# Altium PCB 100871.pcbdoc (part 1 of 2)
Units mm, origin at the board's own origin, x right, y up, seen from the top; angles counter-clockwise.
Board outline 100 x 40 mm, 2 copper layers (Top Layer, Bottom Layer), stack 1.551 mm thick; 101 components, 40 nets, 215 pads, 100 vias.
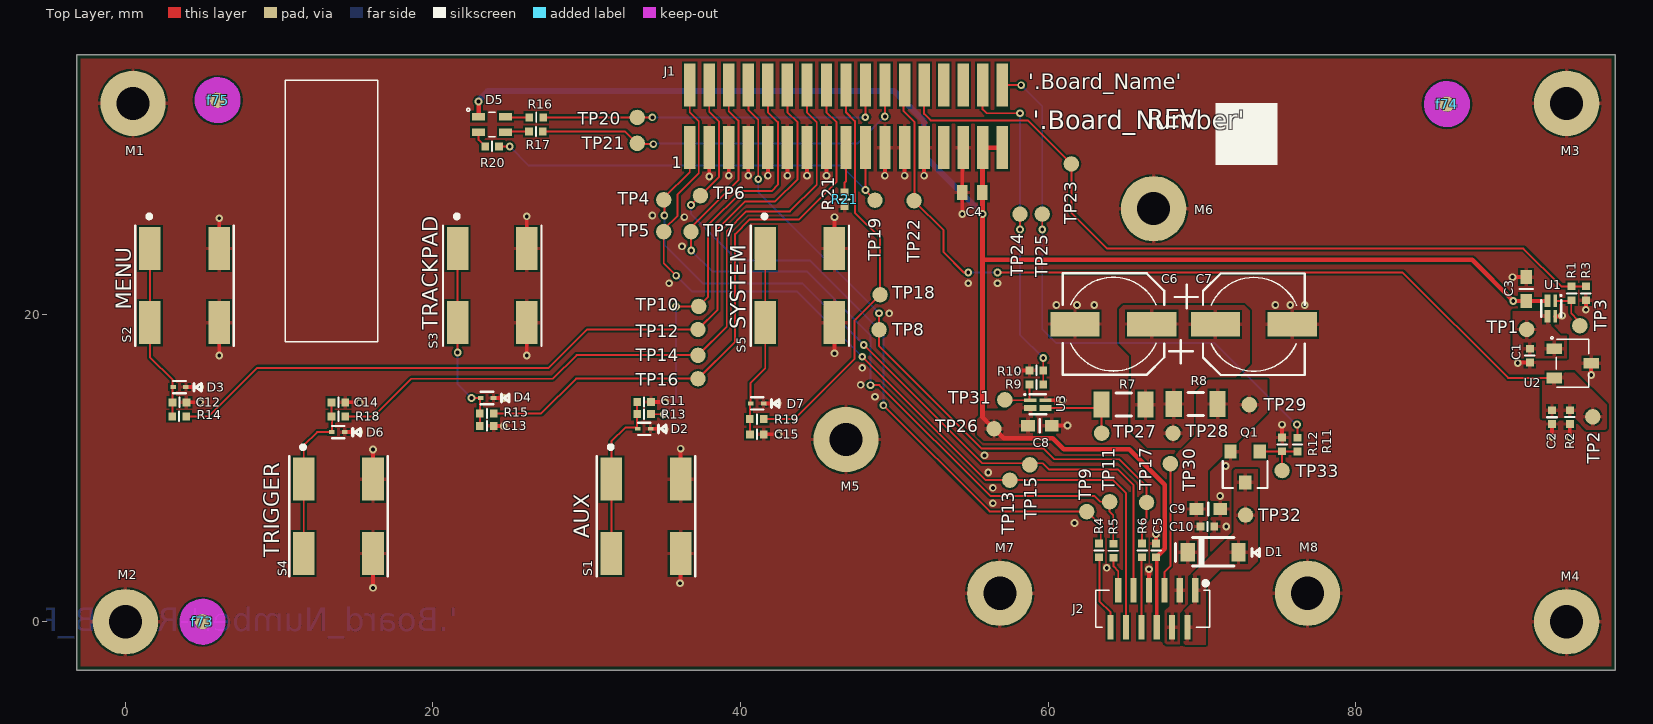
[diagram p0: Top Layer view]
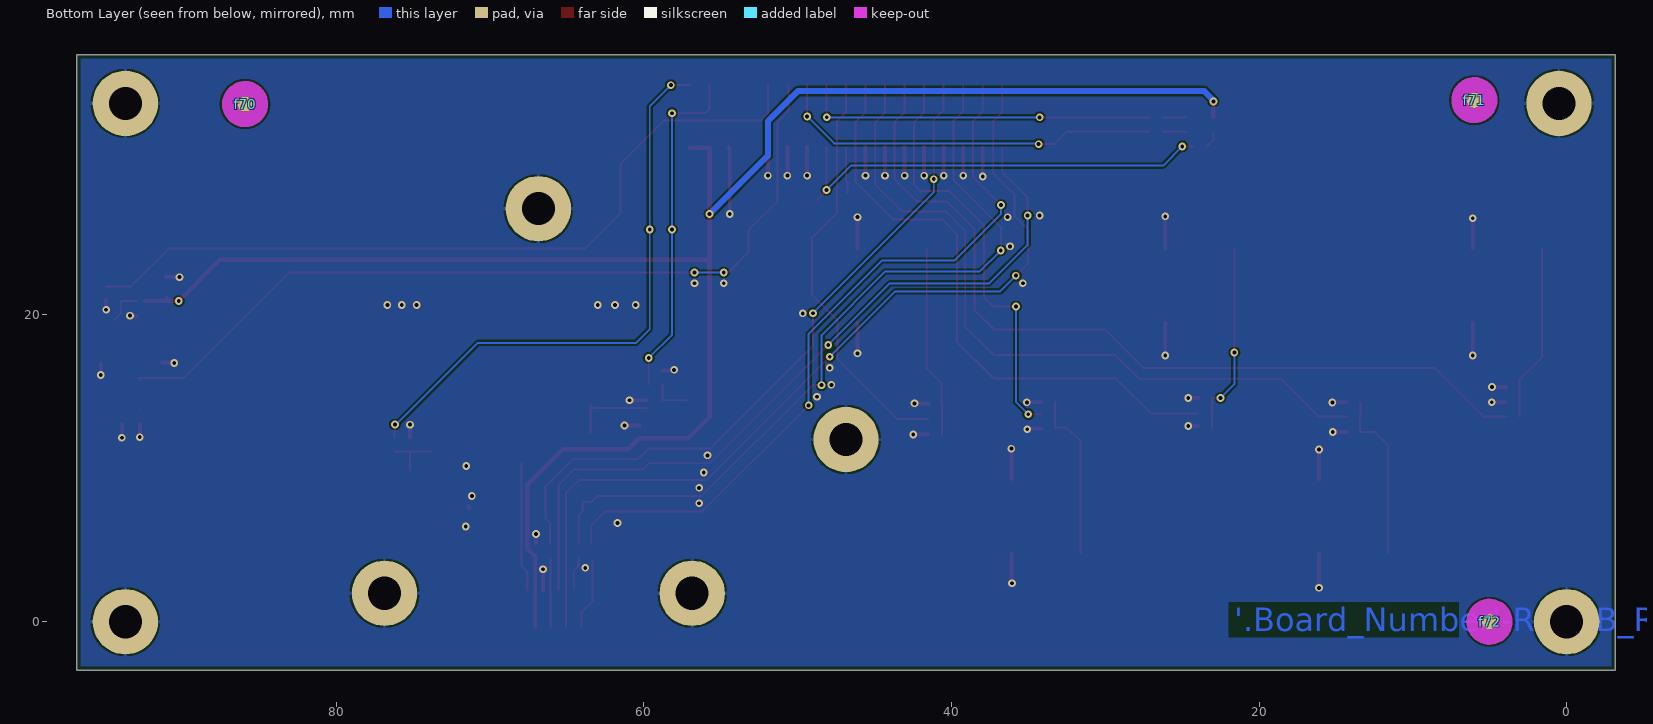
[diagram p1: Bottom Layer view, seen from below]

## Layer stack, top to bottom
Top Solder: solder mask 0.0102, Solder Resist, Dk 3.5
Top Layer: signal copper 0.0356
Dielectric 1: core 1.48, FR-4, Dk 4.2
Bottom Layer: signal copper 0.0356
Bottom Solder: solder mask 0.0102, Solder Resist, Dk 3.5

## Board outline
-3.15,-3.15 -3.15,36.85 96.85,36.85 96.85,-3.15

## Design rules (kind name [scope] priority, off if disabled: settings)
BoardOutlineClearance [All] p1: gap=0.25 except(0: Text-OutlineEdge)
Clearance [All] p1: gap=0.125
ComponentClearance [All] p1: gap=0.18 collisioncheckmode=3 verticalgap=0.18 showdistances=FALSE
HoleSize [All] p1: absolutevalues=TRUE maxlimit=2.7 minlimit=0.025 maxpercent=80.000 minpercent=20.000
MinimumSolderMaskSliver MinimumSolderMaskSliver_1 [isvia vs IsPad] p1: minsoldermaskwidth=0
MinimumSolderMaskSliver [All] p2: minsoldermaskwidth=0.05
PlaneClearance [All] p1: clearance=0.2
PlaneConnect [All] p1: planeconnectstyle=Direct reliefexpansion=0.508 reliefentries=4 reliefconductorwidth=0.254 reliefairgap=0.254
PolygonConnect MTG [HasFootprint('MTG197RD102P')] p1: connectstyle=Direct reliefconductorwidth=0.25 reliefentries=4 polygonreliefangle="90 Angle" airgapwidth=0.125
PolygonConnect POLY_VIA [IsVia vs IsPolygon] p2: connectstyle=Direct reliefconductorwidth=0.254 reliefentries=4 polygonreliefangle="90 Angle" airgapwidth=0.254
PolygonConnect PolygonConnect_1 [All] p3: connectstyle=Relief reliefconductorwidth=0.25 reliefentries=4 polygonreliefangle="90 Angle" airgapwidth=0.125
RoomDefinition ControlBoard [InComponentClass('ControlBoard')] p1: confinementstyle=ConfineIn formatcopy=TRUE lockcomponents=FALSE outline -2.985,-3.217 102.451,-3.217 102.451,38.85 -2.985,38.85
RoutingVias [All] p1: holewidth=0.25 width=0.5 viastyle="Through Hole" minholewidth=0.25 minwidth=0.5 maxholewidth=0.25 maxwidth=0.5
SilkToSilkClearance [All] p1 off: silktosilkclearance=0.05
SilkToSolderMaskClearance [IsPad] p1: minsilkscreentomaskgap=0.125 clearancetoexposedcopper=TRUE
SolderMaskExpansion [All] p1: expansion=0.05
Width PWR_GND [InNetClass('PWR_GND')] p1: maxlimit=0.5 minlimit=0.25 preferedwidth=0.25
Width CRITICAL [InNetClass('MOTOR_DRIVERS')] p2: maxlimit=0.4 minlimit=0.3 preferedwidth=0.4
Width [All] p3: maxlimit=0.5 minlimit=0.125 preferedwidth=0.125
23 further rules are at their usual default settings.

## Classes and differential pairs
component class ControlBoard: C1 C2 C3 C4 C5 C6 C7 C8 C9 C10 C11 C12 C13 C14 C15 D1 D2 D3 D4 D5 D6 D7 J1 J2 M1 M2 M3 M4 M5 M6 M7 M8 Q1 R1 R2 R3 R4 R5 R6 R7 R8 R9 R10 R11 R12 R13 R14 R15 R16 R17 R18 R19 R20 R21 S1 S2 S3 S4 S5 TP1 TP2 TP3 TP4 TP5 TP6 TP7 TP8 TP9 TP10 TP11 TP12 TP13 TP14 TP15 TP16 TP17 TP18 TP19 TP20 TP21 TP22 TP23 TP24 TP25 TP26 TP27 TP28 TP29 TP30 TP31 TP32 TP33 U1 U2 U3

## Components (designator, comment, footprint, x,y, rotation, side; value= is the part's Value field where it differs from the comment)
C1 "10nF" 0402-ipcsm_60 91.307,17.301 r270 top
C2 "10nF" 0402-ipcsm_60 92.746,13.301 r270 top
C3 "0.1UF" 0603-ipcsm_90 91.069,21.626 r90 top
C4 "10uF" c-0603-POL_35H 55.056,27.904 r180 top
C5 "0.1uF" 0402-IPCsm_55 67.017,4.633 r90 top
C6 "330UF" c-elect_FK-D8 64.234,19.35 r0 top
C7 "330UF" c-elect_FK-D8 73.365,19.337 r180 top
C8 "0.1UF" 0603-ipcsm_90 59.45,12.751 r0 top
C9 "1uF" 0603-IPCsm_90 70.4,7.328 r180 top
C10 "0.1uF" 0402-IPCsm_55 70.342,6.194 r0 top
C11 "0.1uF" 0402-IPCsm_55 33.725,14.285 r0 top
C12 "0.1uF" 0402-IPCsm_55 3.52,14.267 r0 top
C13 "0.1uF" 0402-IPCsm_55 23.5,12.734 r0 top
C14 "0.1uF" 0402-IPCsm_55 13.85,14.267 r0 top
C15 "0.1uF" 0402-IPCsm_55 41.055,12.185 r0 top
D1 "1N4148W" SOD123_135 70.717,4.517 r0 top
D2 "ESD9R3.3ST5G" sod923-40 33.725,12.541 r0 top
D3 "ESD9R3.3ST5G" sod923-40 3.52,15.255 r0 top
D4 "ESD9R3.3ST5G" sod923-40 23.514,14.548 r0 top
D5 "APTF1616SEEZGQBDC" led_RBG_1p6x1p6_sm 23.84,32.33 r180 top
D6 "ESD9R3.3ST5G" sod923-40 13.85,12.327 r0 top
D7 "ESD9R3.3ST5G" sod923-40 41.07,14.193 r0 top
f70 "Comment" Fiducial_c100opening300 85.915,33.65 r180 bottom
f71 "Comment" Fiducial_c100opening300 6,33.905 r180 bottom
f72 "Comment" Fiducial_c100opening300 5.015,0 r180 bottom
f73 "Comment" Fiducial_c100opening300 5.015,0 r0 top
f74 "Comment" Fiducial_c100opening300 85.915,33.65 r0 top
f75 "Comment" Fiducial_c100opening300 6,33.905 r0 top
J1 "FTSH-117-01-L-DV" FTSH-117-01-XXX-DV-K 46.85,32.85 r0 top
J2 "MOLEX_ 0781271128" con12_molex_0781271128 66.8,0.85 r0 top
M1 "MTGC425H215P" MTGC425H215P 0.5,33.7 r0 top
M2 "MTGC425H215P" MTGC425H215P 0,0 r0 top
M3 "MTGC425H215P" MTGC425H215P 93.7,33.7 r0 top
M4 "MTGC425H215P" MTGC425H215P 93.7,0 r0 top
M5 "MTGC425H215P" mtgc425h215p 46.85,11.85 r0 top
M6 "MTGC425H215P" mtgc425h215p 66.85,26.85 r0 top
M7 "MTGC425H215P" MTGC425H215P 56.85,1.85 r0 top
M8 "MTGC425H215P" MTGC425H215P 76.85,1.85 r0 top
Q1 "DMN2300U-7" SOT23-GSD_47H_DMN2075U 72.8,10.048 r180 top
R1 "240" 0402-IPCsm_40 94.029,21.351 r270 top
R2 "4.7K" 0402-IPCsm_40 93.904,13.301 r270 top
R3 "4.7K" 0402-IPCsm_40 94.949,21.351 r270 top
R4 "33" 0402-IPCsm_40 63.3,4.633 r270 top
R5 "33" 0402-IPCsm_40 64.224,4.615 r270 top
R6 "33" 0402-IPCsm_40 66.1,4.633 r270 top
R7 "5.1" r-1206_28H 64.895,14.11 r0 top
R8 "0.0" r-1206_28H 69.583,14.155 r0 top
R9 "348K" 0402-IPCsm_40 59.225,15.425 r180 top
R10 "4.7K" 0402-IPCsm_40 59.225,16.342 r180 top
R11 "0" 0402-IPCsm_40 76.2,11.512 r270 top
R12 "10K" 0402-IPCsm_40 75.2,11.525 r90 top
R13 "33" 0402-IPCsm_40 33.725,13.489 r180 top
R14 "33" 0402-IPCsm_40 3.5,13.35 r180 top
R15 "33" 0402-IPCsm_40 23.5,13.539 r180 top
R16 "240" 0402-IPCsm_40 26.715,32.787 r180 top
R17 "124" 0402-IPCsm_40 26.69,31.87 r180 top
R18 "33" 0402-IPCsm_40 13.85,13.35 r180 top
R19 "33" 0402-IPCsm_40 41.05,13.169 r180 top
R20 "124" 0402-IPCsm_40 23.84,30.9 r180 top
R21 "0" 0402-IPCsm_40 46.762,27.46 r90 top
S1 "TL3301EF160QJ" SW_TL3301_J 33.85,6.85 r270 top
S2 "TL3301EF160QJ" SW_TL3301_J 3.85,21.85 r270 top
S3 "TL3301EF160QJ" SW_TL3301_J 23.85,21.85 r270 top
S4 "TL3301EF160QJ" SW_TL3301_J 13.85,6.85 r270 top
S5 "TL3301EF160QJ" SW_TL3301_J 43.85,21.85 r270 top
TP1 "tp-1mm" TP-S100_SMT 91.1,19 r0 top
TP2 "tp-1mm" TP-S100_SMT 95.4,13.32 r0 top
TP3 "tp-1mm" TP-S100_SMT 94.558,19.244 r0 top
TP4 "tp-1mm" TP-S100_SMT 35,27.425 r0 top
TP5 "tp-1mm" TP-S100_SMT 35,25.358 r0 top
TP6 "tp-1mm" TP-S100_SMT 37.384,27.7 r90 top
TP7 "tp-1mm" TP-S100_SMT 36.777,25.358 r90 top
TP8 "tp-1mm" TP-S100_SMT 49,18.978 r180 top
TP9 "tp-1mm" TP-S100_SMT 62.5,7.157 r90 top
TP10 "tp-1mm" TP-S100_SMT 37.275,20.5 r90 top
TP11 "tp-1mm" TP-S100_SMT 63.991,7.8 r90 top
TP12 "tp-1mm" TP-S100_SMT 37.229,19 r90 top
TP13 "tp-1mm" TP-S100_SMT 57.5,9.2 r90 top
TP14 "tp-1mm" TP-S100_SMT 37.229,17.317 r90 top
TP15 "tp-1mm" TP-S100_SMT 58.8,10.2 r90 top
TP16 "tp-1mm" TP-S100_SMT 37.229,15.796 r90 top
TP17 "tp-1mm" TP-S100_SMT 66.393,7.756 r90 top
TP18 "tp-1mm" TP-S100_SMT 49.067,21.255 r180 top
TP19 "tp-1mm" TP-S100_SMT 48.734,27.4 r90 top
TP20 "tp-1mm" TP-S100_SMT 33.275,32.787 r0 top
TP21 "tp-1mm" TP-S100_SMT 33.275,31.1 r90 top
TP22 "tp-1mm" TP-S100_SMT 51.275,27.375 r90 top
TP23 "tp-1mm" TP-S100_SMT 61.5,29.762 r90 top
TP24 "tp-1mm" TP-S100_SMT 58.158,26.5 r90 top
TP25 "tp-1mm" TP-S100_SMT 59.608,26.5 r90 top
TP26 "tp-1mm" TP-S100_SMT 56.475,12.547 r90 top
TP27 "tp-1mm" TP-S100_SMT 63.47,12.255 r90 top
TP28 "tp-1mm" TP-S100_SMT 68.112,12.255 r90 top
TP29 "tp-1mm" TP-S100_SMT 73.07,14.11 r90 top
TP30 "tp-1mm" TP-S100_SMT 67.936,10.276 r0 top
TP31 "tp-1mm" TP-S100_SMT 57.175,14.424 r0 top
TP32 "tp-1mm" TP-S100_SMT 72.826,6.931 r270 top
TP33 "tp-1mm" TP-S100_SMT 75.2,9.825 r270 top
U1 "SLG59M1440V" STDFN4_SLG59M144x 92.702,20.361 r270 top
U2 "A1304ELHLX-T" sot23-3_A1304_113 94.092,16.801 r270 top
U3 "SLG59M1442V" STDFN4_SLG59M144x 59.325,14.145 r0 top

## Footprints (in the part's own frame and the unit in brackets; to place one, negate y for a bottom-side part, rotate by r counter-clockwise, add the part's x,y. Pads: shape width x height; smd on the part's side, far side on the other; paste and mask are expansions set on the pad)
0402-IPCsm_40 [mm] "0402-IPCSM_40"
  rect 0.5x0.52 smd mask+0.05: 1(-0.45,0) 2(0.45,0)
  silkscreen extent 0,-0.3 0,0.3, body extent -0.5,-0.2 0.5,0.2, height 0.4
0402-IPCsm_55 [mm] "0402-IPCSM_55"
  rect 0.5x0.52 smd mask+0.05: 1(-0.45,0) 2(0.45,0)
  silkscreen extent 0,-0.3 0,0.3, body extent -0.5,-0.2 0.5,0.2, height 0.55
0402-ipcsm_60 [mm] "0402-IPCSM_60"
  rect 0.5x0.52 smd mask+0.05: 1(-0.45,0) 2(0.45,0)
  silkscreen extent 0,-0.3 0,0.3, body extent -0.5,-0.2 0.5,0.2, height 0.6
0603-ipcsm_90 [mm] "0603-IPCSM_90"
  rect 0.9x0.75 smd mask+0.05: 1(0.775,0) 2(-0.775,0)
  silkscreen extent 0,-0.42 0,0.42, body extent -0.8,-0.3 0.8,0.3, height 0.9
0603-IPCsm_90 [mm] "0603-IPCSM_90"
  rect 0.9x0.75 smd mask+0.05: 1(0.775,0) 2(-0.775,0)
  silkscreen extent 0,-0.42 0,0.42, body extent -0.8,-0.3 0.8,0.3, height 0.9
c-0603-POL_35H [mm] "c-0603-POL_35H"
  rect 0.7x1 smd mask+0.05: N(0.65,0) P(-0.65,0)
  body extent -0.8,-0.4 0.8,0.4, height 0.9
c-elect_FK-D8 [mm] "C-ELECT_FK-D"
  rect 3.2x1.6 smd: N(-2.5,0) P(2.5,0)
  silkscreen extent -3.3,-3.3 5.16,3.3, body extent -3.3,-3.3 3.3,3.3, height 8
con12_molex_0781271128 [mm] "con12_molex_0781271128"
  rect 0.4x1.6 smd: 1(2.75,1.2) 2(2.25,-1.2) 3(1.75,1.2) 4(1.25,-1.2) 5(0.75,1.2) 6(0.25,-1.2) 7(-0.25,1.2) 8(-0.75,-1.2) 9(-1.25,1.2) 10(-1.75,-1.2) 11(-2.25,1.2) 12(-2.75,-1.2)
  silkscreen extent -3.7,-1.2 3.7,1.78, body extent -3.7,-1.2 3.7,1.2, height 4.1
Fiducial_c100opening300 [mm]
  round 1 smd paste-10 mask+1: 0(0,0)
  Top Layer keep-out circle w1: c0,0 r1
FTSH-117-01-XXX-DV-K [mil]
  rect 29x110 smd mask+2: 1(-400,-80) 2(-400,80) 3(-350,-80) 4(-350,80) 5(-300,-80) 6(-300,80) 7(-250,-80) 8(-250,80) 9(-200,-80) 10(-200,80) 11(-150,-80) 12(-150,80) 13(-100,-80) 14(-100,80) 15(-50,-80) 16(-50,80) 17(0,-80) 18(0,80) 19(50,-80) 20(50,80) 21(100,-80) 22(100,80) 23(150,-80) 24(150,80) 25(200,-80) 26(200,80) 27(250,-80) 28(250,80) 29(300,-80) 30(300,80) 31(350,-80) 32(350,80) 33(400,-80) 34(400,80)
  body extent -424,-68 425,68, height 220
led_RBG_1p6x1p6_sm [mm] "led_RBG_1p6x1p6_sm"
  rect 0.85x0.5 smd mask+0.1: 1(0.875,-0.5) 2(-0.875,-0.5) 3(-0.875,0.5) 4(0.875,0.5)
  silkscreen extent -0.2,-1.05 1.65,0.8, body extent -0.8,-0.8 0.8,0.8, height 0.7
MTGC425H215P [mm] "MTGC425H215P"
  round 4.25 hole 2.15: 1(0,0)
mtgc425h215p [mm] "MTGC425H215P"
  round 4.25 hole 2.15: 1(0,0)
r-1206_28H [mm] "Chip Resistor, 2-Leads, Body 3.10x1.60mm, IPC Medium Density"
  rect 1.05x1.7 smd: 1(-1.425,0) 2(1.425,0)
  silkscreen extent -0.5,-0.75 0.5,0.75, body extent -1.6,-0.85 1.6,0.85, height 0.65
SOD123_135 [mm] "SOD123_135"
  rect 0.92x1.22 smd: A(1.65,0) C(-1.65,0)
  silkscreen extent -2.45,-0.9 3.03,0.95
sod923-40 [mm] "SOD923 .4mm High"
  rect 0.36x0.25 smd mask+0.05: A(0.42,0) C(-0.42,0)
  silkscreen extent -0.4,-0.4 1.44,0.4, body extent -0.45,-0.35 0.45,0.35, height 0.4
sot23-3_A1304_113 [mm] "sot23-3_A1304_113"
  rect 0.7x1 smd mask+0.05: 1(-0.95,-1.2) 2(0.95,-1.2) 3(0,1.2)
  silkscreen extent -1.73,-1.42 1.55,1.04, body extent -1.55,-1.05 1.55,1.05, height 1.13
SOT23-GSD_47H_DMN2075U [mm] "SOT23-GSD_47H_DMN2075U"
  rect 0.8x0.9 smd mask+0.05: D(0,0.987) G(-0.95,-1.013) S(0.95,-1.013)
  silkscreen extent -1.45,-0.38 1.45,1.36, body extent -1.43,-0.68 1.45,0.65, height 1.2
STDFN4_SLG59M144x [mm] "SLG59M1442V or SLG59M1440V"
  rect 0.8x0.21 smd mask+0.05: 1(-0.5,0.25) 4(0.5,0.25)
  rect 0.8x0.41 smd mask+0.05: 2(-0.5,-0.25) 3(0.5,-0.25)
  silkscreen extent -0.91,-0.66 0.53,0.68, body extent -0.53,-0.53 0.53,0.53, height 0.6
SW_TL3301_J [mm] "SWITCH TACTILE SPST-NO 0.05A 12V"
  rect 2.795x1.4 smd mask+0.05: 1(-2.412,-2.25) 2(2.412,-2.25) 3(-2.412,2.25) 4(2.412,2.25)
  silkscreen extent -4.62,-3.2 3.9,3.2, body extent -3,-3 3,3, height 3.6
TP-S100_SMT [mm] "TP-S100_SMT"
  round 1 smd paste-0.5: 1(0,0)
  body extent -0.5,-0.5 0.5,0.5, height 0.01

## Part data
C1 C2: library part C1005X7R1E103K050BB, "CAP CER 10000PF 25V 10% X7R 0402"
C3 C8: library part C0603C104J4RACTU, "CAP CER 0.1UF 16V 5% X7R 0603"
C4: library part 298D106X06R3M2T, "CAP TANT 10UF 6.3V 20% 0603"
C5 C10 C11 C12 C13 C14 C15: library part GMK105BJ104KV-F, "CAP CER 0.1UF 35V 10% X5R 0402"
C6 C7: library part EEE-FK0J331XP, "CAP ALUM 330UF 20% 6.3V SMD"
C9: library part GRM188R61E105KA12D, "CAP CER 1UF 25V 10% X5R 0603"
D1: library part 1N4148W-TP, "DIODE SWITCH 100V 0.15A SOD123"
D2 D3 D4 D6 D7: "TVS DIODE 3.3VWM 7.8VC SOD923"
D5: "LED RGB CLEAR 0606 SMD"
J1: "34 Positions Header, Unshrouded Connector 0.050\" (1.27mm) Surface Mount Gold"
J2: library part 0781271128, "CONN FFC VERT 12POS 0.50MM SMD"
M1 M2 M3 M4 M5 M6 M7 M8: "MTG, 4.25mm PAD, 2.15mm Plated Hole"
Q1: "MOSFET N-CH 20V 1.24A SOT23"
R1 R16: library part ERJ-2RKF2400X, "RES 240 OHM 1/10W 1% 0402 SMD"
R2 R3 R10: library part ERJ-2RKF4701X, "RES 4.70K OHM 1/10W 1% 0402 SMD"
R4 R5 R6 R13 R14 R15 R18 R19: library part ERJ-2GEJ330X, "RES 33 OHM 1/16W 5% 0402 SMD"
R7: library part RC1206JR-075R1L, "RES SMD 5.1 OHM 5% 1/4W 1206"
R8: library part ERJ-8GEY0R00V, "RES ZERO OHM 1/4W 5% 1206 SMD"
R9: library part ERJ-2RKF3483X, "RES SMD 348K OHM 1% 1/10W 0402"
R11 R21: library part ERJ-2GE0R00X, "RES 0.0 OHM 1/10W JUMP 0402 SMD"
R12: library part ERJ-2GEJ103X, "RES 10K OHM 1/10W 5% 0402 SMD"
R17 R20: library part RC0402FR-07124RL, "RES SMD 124 OHM 1% 1/16W 0402"
S1 S2 S3 S4 S5: "SWITCH TACTILE SPST-NO 0.05A 12V"
TP1 TP2 TP3 TP4 TP5 TP6 TP7 TP8 TP9 TP10 TP11 TP12 TP13 TP14 TP15 TP16 TP17 TP18 TP19 TP20 TP21 TP22 TP23 TP24 TP25 TP26 TP27 TP28 TP29 TP30 TP31 TP32 TP33: library part TP0042, "TESTPOINT, 1MM SMD, Square pad, Round SM opening"
U1: "Single 40mohm 1A Load Switch w/discharge"
U2: "IC HALL EFFECT SENSOR SOT-23W"
U3: "Single 40mohm 1A Load Switch"

## Via types
v1: diameter 0.5, hole 0.25, Top Layer to Bottom Layer, tented both sides, 100 vias

## Nets (pads, with @x,y where several pads share a name; then routed paths per layer and width w, separated by ;. In a path a pad name is that pad's centre, name@x,y a point inside that pad or via, vN(x,y) a via of type N, cw(c..) or ccw(c..) an arc to the next point about the centre after c; other vN are vias at no path point)
AN_TRIG_RAIL_EN: J1.26 R1.1 R3.1 TP23.1 | length 51.4
  Top Layer w0.125: J1.26@51.93,34.882 51.93,33.014 52.348,32.596 58.666,32.596 TP23.1@61.5,29.762 61.5,26.6 63.837,24.263 90.89,24.263 93.353,21.8 R3.1@94.949,21.801
AN_TRIGGER: C2.1 J1.24 R2.1 TP2.1 TP22.1 U2.2 | length 55.3
  Top Layer w0.125: J1.24@50.66,34.882 50.6,34.822 50.6,33.2 51.3,32.5 TP22.1@51.3,27.35 ; TP22.1@51.275,27.375 TP22.1@51.3,27.35 ; v1(54.8,22.7) 54.521,22.7 53.2,24.021 53.2,25.45 TP22.1@51.3,27.35 ; v1(56.7,22.7) 83.043,22.7 89.892,15.851 U2.2@92.892,15.851 U2.2@92.746,15.705
  Bottom Layer w0.125: v1(54.8,22.7) v1(56.7,22.7)
BTN_AUX: J1.10 R13.1 TP10.1 | length 27.5
  Top Layer w0.125: R13.1@34.175,13.489 v1(35,13.489) ; v1(35.801,20.492) 37.267,20.492 TP10.1@37.275,20.5 37.876,21.101 37.876,25.764 40.112,28 42.015,28 42.425,28.41 42.425,32.475 41.77,33.13 J1.10@41.77,34.882
  Bottom Layer w0.125: v1(35,13.489) 35.801,14.29 v1(35.801,20.492)
BTN_MENU: J1.12 R14.1 TP12.1 | length 55.6
  Top Layer w0.125: R14.1@3.95,13.35 5.426,13.35 8.576,16.5 27.525,16.5 30.025,19 TP12.1@37.229,19 38.5,20.271 38.5,25.536 40.289,27.325 42.25,27.325 43.7,28.775 43.7,32.475 43.04,33.135 J1.12@43.04,34.882
BTN_SYS: J1.18 R19.1 TP18.1 | length 26.9
  Top Layer w0.125: R19.1@41.5,13.169 43.474,13.169 47.403,17.099 47.403,19.591 TP18.1@49.067,21.255 49.067,24.958 47.425,26.6 47.425,32.55 46.85,33.125 J1.18@46.85,34.882
BTN_TRACK: J1.16 R15.1 TP16.1 | length 39.1
  Top Layer w0.125: R15.1@24,13.539 27.034,13.539 29.3,15.805 37.219,15.805 TP16.1@37.229,15.796 39.642,18.208 39.642,25.203 40.575,26.136 43.781,26.136 46.225,28.581 46.225,32.49 45.58,33.135 J1.16@45.58,34.882
BTN_TRIG: J1.14 R18.1 TP14.1 | length 47.2
  Top Layer w0.125: R18.1@14.3,13.35 16.156,13.35 18.601,15.796 27.796,15.796 29.337,17.337 TP14.1@37.115,17.337 ; TP14.1@37.229,17.317 39.099,19.188 39.099,25.399 40.379,26.679 43.207,26.679 44.95,28.422 44.95,32.475 44.31,33.115 J1.14@44.31,34.882
FLEX_B_MISO: J1.6 R5.1 TP7.1 TP11.1 | length 51
  Top Layer w0.125: v1(36.791,24.132) 36.764,24.16 36.764,25.625 39.85,28.712 39.85,32.575 39.23,33.195 J1.6@39.23,34.882 ; v1(48.438,15.383) 49.019,15.383 56.227,8.175 62.996,8.175 63.371,7.8 TP11.1@63.991,7.8 63.991,7.164 64.224,6.931 R5.1@64.224,5.065
  Bottom Layer w0.125: v1(36.791,24.132) 38.153,22.77 44.305,22.77 48.438,18.638 v1(48.438,15.383)
FLEX_B_MOSI: J1.8 R6.1 TP8.1 TP17.1 | length 45.5
  Top Layer w0.125: J1.8@40.5,34.882 40.5,33.28 41.145,32.635 v1(41.145,28.77) ; v1(49,20.05) TP8.1@49,18.978 49,17.92 55.668,11.252 59.691,11.252 60.38,10.563 64.607,10.563 66.393,8.777 TP17.1@66.393,7.756 66.393,6.714 66.1,6.421 R6.1@66.1,5.083
  Bottom Layer w0.125: v1(41.145,28.77) 41.145,27.905 v1(49,20.05)
FLEX_B_SCLK: J1.4 R4.1 TP6.1 TP9.1 | length 48.3
  Top Layer w0.125: v1(36.777,27.093) TP6.1@37.384,27.7 38.6,28.916 38.6,32.515 37.96,33.155 J1.4@37.96,34.882 ; v1(49.282,14.068) 56.182,7.167 62.51,7.167 63.41,6.268 R4.1@63.41,5.083
  Bottom Layer w0.125: v1(36.777,27.093) 36.777,26.5 39.797,23.48 44.512,23.48 49.282,18.71 v1(49.282,14.068)
FPC1_TEST: J2.5 TP30.1 | length 8.4
  Top Layer w0.125: J2.5@67.55,2.05 67.55,3.23 67.936,3.615 TP30.1@67.936,10.276
GND: C1.2 C2.2 C3.1 C4.N C5.2 C6.N C7.N C8.1 C9.2 C10.2 C11.2 C12.2 C13.2 C14.2 C15.2 D2.A D3.A D4.A D6.A D7.A J1.3 J1.5 J1.7 J1.9 J1.11 J1.13 J1.15 J1.21 J1.23 J1.25 J1.29 J2.7 M1.1 M2.1 M3.1 M4.1 M5.1 M6.1 M7.1 M8.1 Q1.S R2.2 R3.2 R10.2 R12.2 R21.1 S1.3 S1.4 S2.3 S2.4 S3.3 S3.4 S4.3 S4.4 S5.3 S5.4 U1.4 U2.3 U3.4 | length 63.8
  Top Layer w0.25: D3.A@3.94,15.255 v1(4.859,15.255) ; C12.2@3.97,14.267 v1(4.875,14.267) ; v1(6.1,17.301) S2.4@6.1,19.438 ; S2.3@6.1,24.263 v1(6.1,26.225) ; D6.A@14.27,12.327 15.202,12.327 v1(15.205,12.33) ; C14.2@14.3,14.267 15.218,14.267 v1(15.23,14.255) ; v1(16.1,2.2) S4.4@16.1,4.438 ; S4.3@16.1,9.263 v1(16.1,11.2) ; D4.A@23.934,14.548 24.594,14.548 v1(24.599,14.543) ; C13.2@23.95,12.734 24.59,12.734 v1(24.599,12.725) ; v1(26.1,17.301) S3.4@26.1,19.438 ; S3.3@26.1,24.263 v1(26.1,26.35) ; D2.A@34.147,12.541 35.041,12.541 v1(35.067,12.515) ; C11.2@34.175,14.285 35.067,14.285 v1(35.092,14.26) ; v1(36.055,2.5) 36.1,2.545 S1.4@36.1,4.438 ; S1.3@36.1,9.263 v1(36.1,11.254) ; v1(37.96,28.95) J1.3@37.96,30.818 ; v1(39.23,29) J1.5@39.23,30.818 J1.5@39.23,30.868 ; v1(40.5,29) J1.7@40.5,30.818 J1.7@40.5,30.868 ; D7.A@41.49,14.193 42.399,14.193 v1(42.4,14.194) ; C15.2@41.505,12.185 42.459,12.185 v1(42.475,12.169) ; v1(41.77,29) J1.9@41.77,30.818 J1.9@41.77,30.868 ; v1(43.04,29) J1.11@43.04,30.818 J1.11@43.04,30.868 ; v1(44.31,29) J1.13@44.31,30.818 J1.13@44.31,30.868 ; v1(45.58,29) J1.15@45.58,30.818 J1.15@45.58,30.868 ; v1(46.1,17.445) S5.4@46.1,19.438 ; S5.3@46.1,24.263 v1(46.1,26.3) ; v1(49.375,29) J1.21@49.375,30.868 ; v1(50.66,29) J1.23@50.66,30.818 J1.23@50.66,30.868 ; v1(51.93,29) J1.25@51.93,30.818 J1.25@51.93,30.868 ; v1(54.406,26.5) C4.N@54.406,27.904 54.406,30.754 J1.29@54.47,30.818 J1.29@54.47,30.868 ; v1(58.025,16.375) 58.058,16.342 R10.2@58.775,16.342 ; U3.4@59.825,14.4 v1(60.925,14.4) ; C8.1@60.225,12.751 v1@61.245,12.751 ; J2.7@66.55,2.05 v1(66.55,3.413) ; v1(67,5.7) 67,5.1 C5.2@67.017,5.083 ; C9.2@71.317,7.377 71.288,7.406 C9.2@71.4,7.518 ; R12.2@75.2,11.975 v1(75.2,12.812) ; v1(90.175,22.4) v1(90.175,22.4) C3.1@91.069,22.401 ; v1(90.525,16.825) 90.551,16.851 C1.2@91.307,16.851 ; C2.2@92.746,12.851 92.746,12.021 v1(92.767,12) ; U1.4@92.952,19.851 93.468,19.851 93.517,19.9 v1(93.4,19.9) ; R2.2@93.904,12.851 93.904,11.979 v1(93.925,11.958) ; v1(94.949,20.285) R3.2@94.949,20.901 ; U2.3@95.292,16.801 95.292,16.043 v1(95.3,16.035)
  other v1: 63.8,3.5 71.567,6.194 61.7,6.421 56.4,7.7 71.174,8.175 56.4,8.7 56.1,9.7 71.534,10.123 55.85,10.814 61.25,12.756 48.73,14.63 47.8,15.4 47.907,16.502 49.664,20.047 60.528,20.587 61.865,20.587 62.985,20.587 74.761,20.587 75.727,20.587 76.665,20.587 35.353,22 54.8,22 56.7,22 36.188,24.403 36.342,26.3 34.262,26.415
HAPTIC: J1.34 R11.1 TP25.1 | length 38.7
  Top Layer w0.125: J1.34@57.01,34.882 v1(58.233,34.882) ; v1(59.608,25.5) TP25.1@59.608,26.5 ; v1(76.175,12.821) 76.2,12.796 R11.1@76.2,11.962
  Bottom Layer w0.125: v1(58.233,34.882) 59.608,33.507 v1(59.608,25.5) 59.608,19.017 60.5,18.125 70.784,18.125 v1@76.175,12.734
HAPTIC_RAIL_EN: J1.32 R9.1 R10.1 TP24.1 | length 23.4
  Top Layer w0.125: J1.32@55.74,34.882 55.735,34.877 55.735,33.306 55.985,33.056 v1(58.158,33.056) ; v1(58.158,25.5) TP24.1@58.158,26.5 ; R9.1@59.675,15.425 R10.1@59.675,16.342 v1(59.675,17.15)
  Bottom Layer w0.125: v1(58.158,33.056) v1(58.158,25.5) 58.158,18.667 v1(59.675,17.15)
MCU_LED_B: J1.19 R20.1 TP19.1 | length 28.7
  Top Layer w0.125: R20.1@24.29,30.9 v1(24.99,30.9) ; J1.19@48.12,30.818 v1(48.12,28.065) 48.12,28.014 TP19.1@48.734,27.4
  Bottom Layer w0.125: v1(24.99,30.9) 26.24,29.65 46.535,29.65 v1(48.12,28.065)
MCU_LED_G: J1.22 R17.1 TP21.1 | length 25.4
  Top Layer w0.125: R17.1@27.14,31.87 32.48,31.87 33.3,31.05 v1(34.325,31.05) ; v1(49.375,32.85) 49.39,32.865 J1.22@49.39,34.882
  Bottom Layer w0.125: v1@34.325,30.875 34.55,31.1 47.625,31.1 v1(49.375,32.85)
MCU_LED_R: J1.20 R16.1 TP20.1 | length 23
  Top Layer w0.125: R16.1@27.165,32.787 TP20.1@33.275,32.787 v1(34.262,32.787) ; v1(48.1,32.8) 48.12,32.82 J1.20@48.12,34.882
  Bottom Layer w0.125: v1(34.262,32.787) 48.087,32.787 v1(48.1,32.8)
NCONTR_MODE: J1.17 R21.2 | length 2.9
  Top Layer w0.125: R21.2@46.762,27.91 46.762,28.552 46.85,28.639 J1.17@46.85,30.818
NetC1_1: C1.1 TP1.1 U1.3 U2.1
NetC6_P: C6.P C7.P R7.2 R8.1 TP28.1
NetC11_1: C11.1 D2.C R13.2 S1.1 S1.2 | length 11.1
  Top Layer w0.125: S1.2@31.6,4.438 S1.1@31.6,9.263 31.6,11.723 32.5,12.623 33.225,12.623 33.275,12.573 R13.2@33.275,13.489 33.263,13.502 C11.1@33.263,14.323
NetC12_1: C12.1 D3.C R14.2 S2.1 S2.2 | length 11.6
  Top Layer w0.125: S2.1@1.6,24.263 S2.2@1.6,19.438 1.6,17.207 3.071,15.736 C12.1@3.07,14.267 ; R14.2@3.05,13.35 3.07,13.37 C12.1@3.07,14.267 ; D3.C@3.079,15.276 D3.C@3.1,15.255
NetC13_1: C13.1 D4.C R15.2 S3.1 S3.2 | length 12.8
  Top Layer w0.125: v1(21.6,17.5) S3.2@21.6,19.438 S3.1@21.6,24.263 ; v1(22.5,14.547) 22.5,14.503 22.544,14.548 D4.C@23.094,14.548 23.05,14.503 R15.2@23.05,13.539 ; C13.1@23.1,12.587 23.064,12.623 23.064,13.504 R15.2@23.1,13.539
  Bottom Layer w0.125: v1(21.6,17.5) 21.6,15.447 v1(22.5,14.547)
NetC14_1: C14.1 D6.C R18.2 S4.1 S4.2 | length 11.2
  Top Layer w0.125: S4.2@11.6,4.438 S4.1@11.6,9.263 11.6,11.458 12.469,12.327 D6.C@13.43,12.327 13.43,12.958 13.45,12.938 13.45,13.3 R18.2@13.4,13.35 C14.1@13.4,14.267
NetC15_1: C15.1 D7.C R19.2 S5.1 S5.2 | length 12.5
  Top Layer w0.125: C15.1@40.605,12.185 40.605,13.164 R19.2@40.6,13.169 40.6,14.143 D7.C@40.65,14.193 40.65,15.522 41.6,16.472 S5.2@41.6,19.438 S5.1@41.6,24.263
NetD1_A: D1.A J2.1 J2.2 Q1.D TP32.1
NetD5_2: D5.2 R16.2 | length 1.6
  Top Layer w0.125: D5.2@24.715,32.83 24.757,32.787 R16.2@26.265,32.787
NetD5_3: D5.3 R17.2 | length 1.5
  Top Layer w0.125: D5.3@24.715,31.83 24.755,31.87 R17.2@26.24,31.87
NetD5_4: D5.4 R20.2 | length 1.1
  Top Layer w0.125: D5.4@22.965,31.83 22.965,31.325 R20.2@23.39,30.9
NetJ2_8: J2.8 R6.2 | length 4.6
  Top Layer w0.125: J2.8@66.05,-0.35 66.05,4.133 R6.2@66.1,4.183
NetJ2_11: J2.11 R5.2 | length 2.2
  Top Layer w0.125: R5.2@64.246,4.165 64.246,3.595 64.55,3.292 J2.11@64.55,2.05
NetJ2_12: J2.12 R4.2 | length 4.6
  Top Layer w0.125: R4.2@63.329,3.992 63.329,1.325 64.05,0.605 J2.12@64.05,-0.35
NetQ1_G: Q1.G R11.2 R12.1 TP33.1 | length 3.5
  Top Layer w0.125: Q1.G@73.75,11.061 R12.1@75.127,11.061 ; TP33.1@75.2,9.825 R12.1@75.2,10.988 ; R12.1@75.213,11.062 R11.2@76.2,11.062
NetR1_2: R1.2 TP3.1 U1.1 | length 2.5
  Top Layer w0.125: U1.1@92.952,20.851 94,20.851 94,20.047 TP3.1@94.433,19.614
NetR7_1: R7.1 TP27.1 U3.3 | length 5.6
  Top Layer w0.125: U3.3@59.825,13.89 63.249,13.89 R7.1@63.47,14.11 63.47,12.31 TP27.1@63.416,12.255
NetR9_2: R9.2 TP31.1 U3.1 | length 2.7
  Top Layer w0.125: TP31.1@57.175,14.424 57.2,14.4 58.825,14.4 58.775,14.45 R9.2@58.775,15.425
PAD_DR: J1.1 J2.9 TP4.1 TP15.1 | length 50.8
  Top Layer w0.125: v1(35.041,26.409) 35.041,27.586 36.69,29.235 J1.1@36.69,30.818 ; v1(48,17.995) 55.695,10.3 59.63,10.3 60.03,9.9 64.511,9.9 65.55,8.861 J2.9@65.55,2.05
  Bottom Layer w0.125: v1(35.041,26.409) 35.041,24.506 37.547,22 43.995,22 v1(48,17.995)
PAD_SS: J1.2 J2.10 TP5.1 TP13.1 | length 57.7
  Top Layer w0.125: v1(35.809,22.5) 35,23.309 TP5.1@35,25.358 35,25.5 35.903,26.403 35.903,27.775 37.275,29.147 37.275,32.525 36.69,33.11 J1.2@36.69,34.882 ; v1(47.903,17.224) 55.927,9.2 TP13.1@57.5,9.2 64.228,9.2 65.05,8.378 J2.10@65.05,-0.35
  Bottom Layer w0.125: v1(35.809,22.5) 36.837,21.472 43.655,21.472 v1(47.903,17.224)
VCC_3V3_APP: C3.2 C4.P C5.1 C8.2 D5.1 J1.31 J1.33 J2.6 TP26.1 U1.2 U3.2 | length 118.6
  Top Layer w0.25: J1.31@55.725,30.803 J1.31@55.74,30.818 ; C5.1@67.017,4.183 67.05,4.15 J2.6@67.05,-0.35 ; v1(90.227,20.851) C3.2@91.069,20.851 ; C3.2@90.994,21.035 91.178,20.851 U1.2@92.442,20.851
  Top Layer w0.3: D5.1@22.965,32.83 v1(22.965,33.825) ; C4.P@55.706,27.904 C4.P@55.725,27.904 ; J1.31@55.725,30.803 C4.P@55.725,27.904 ; J1.31@55.74,30.818 J1.33@57.01,30.818 ; C5.1@67.017,4.183 67.577,4.743 67.577,8.891 65.268,11.2 61.016,11.2 60.289,11.927 57.095,11.927 TP26.1@56.475,12.547 55.725,13.297 55.725,23.525 ; v1(90.227,20.851) 87.553,23.525 55.725,23.525 ; 55.725,23.525 v1(55.725,26.5) C4.P@55.725,27.904
  Bottom Layer w0.4: v1@22.964,33.902 23.562,34.5 ; 23.64,34.5 49.975,34.5 51.93,32.545 51.93,30.295 v1(55.725,26.5) ; v1@90.227,20.798 v1(90.227,20.851)
VCC_HAPTICS: C9.1 C10.1 D1.C J2.3 J2.4 R8.2 TP29.1
pads on no net: f70.0 f71.0 f72.0 f73.0 f74.0 f75.0 J1.27 J1.28 J1.30

## Polygon pours and split planes (outlines as drawn)
no net on FAB_DWG (solid): -238.384,33.805 ccw(c-238.884,33.805) -238.884,34.305 ccw(c-238.884,33.805) -239.384,33.805 ccw(c-238.884,33.805) -238.884,33.305 ccw(c-238.884,33.805) -238.384,33.805
no net on FAB_DWG (solid): -238.384,9.805 ccw(c-238.884,9.805) -238.884,10.305 ccw(c-238.884,9.805) -239.384,9.805 ccw(c-238.884,9.805) -238.884,9.305 ccw(c-238.884,9.805) -238.384,9.805
no net on FAB_DWG (solid): -242.384,33.805 ccw(c-242.884,33.805) -242.884,34.305 ccw(c-242.884,33.805) -243.384,33.805 ccw(c-242.884,33.805) -242.884,33.305 ccw(c-242.884,33.805) -242.384,33.805
no net on FAB_DWG (solid): -244.384,33.805 ccw(c-244.884,33.805) -244.884,34.305 ccw(c-244.884,33.805) -245.384,33.805 ccw(c-244.884,33.805) -244.884,33.305 ccw(c-244.884,33.805) -244.384,33.805
no net on FAB_DWG (solid): -246.384,33.805 ccw(c-246.884,33.805) -246.884,34.305 ccw(c-246.884,33.805) -247.384,33.805 ccw(c-246.884,33.805) -246.884,33.305 ccw(c-246.884,33.805) -246.384,33.805
no net on FAB_DWG (solid): -240.384,33.805 ccw(c-240.884,33.805) -240.884,34.305 ccw(c-240.884,33.805) -241.384,33.805 ccw(c-240.884,33.805) -240.884,33.305 ccw(c-240.884,33.805) -240.384,33.805
no net on FAB_DWG (solid): -242.384,9.805 ccw(c-242.884,9.805) -242.884,10.305 ccw(c-242.884,9.805) -243.384,9.805 ccw(c-242.884,9.805) -242.884,9.305 ccw(c-242.884,9.805) -242.384,9.805
no net on FAB_DWG (solid): -244.384,9.805 ccw(c-244.884,9.805) -244.884,10.305 ccw(c-244.884,9.805) -245.384,9.805 ccw(c-244.884,9.805) -244.884,9.305 ccw(c-244.884,9.805) -244.384,9.805
no net on FAB_DWG (solid): -246.384,9.805 ccw(c-246.884,9.805) -246.884,10.305 ccw(c-246.884,9.805) -247.384,9.805 ccw(c-246.884,9.805) -246.884,9.305 ccw(c-246.884,9.805) -246.384,9.805
no net on FAB_DWG (solid): -240.384,9.805 ccw(c-240.884,9.805) -240.884,10.305 ccw(c-240.884,9.805) -241.384,9.805 ccw(c-240.884,9.805) -240.884,9.305 ccw(c-240.884,9.805) -240.384,9.805
no net on FAB_DWG (solid): -250.384,33.805 ccw(c-250.884,33.805) -250.884,34.305 ccw(c-250.884,33.805) -251.384,33.805 ccw(c-250.884,33.805) -250.884,33.305 ccw(c-250.884,33.805) -250.384,33.805
no net on FAB_DWG (solid): -248.384,33.805 ccw(c-248.884,33.805) -248.884,34.305 ccw(c-248.884,33.805) -249.384,33.805 ccw(c-248.884,33.805) -248.884,33.305 ccw(c-248.884,33.805) -248.384,33.805
no net on FAB_DWG (solid): -254.384,33.805 ccw(c-254.884,33.805) -254.884,34.305 ccw(c-254.884,33.805) -255.384,33.805 ccw(c-254.884,33.805) -254.884,33.305 ccw(c-254.884,33.805) -254.384,33.805
no net on FAB_DWG (solid): -252.384,33.805 ccw(c-252.884,33.805) -252.884,34.305 ccw(c-252.884,33.805) -253.384,33.805 ccw(c-252.884,33.805) -252.884,33.305 ccw(c-252.884,33.805) -252.384,33.805
no net on FAB_DWG (solid): -250.384,9.805 ccw(c-250.884,9.805) -250.884,10.305 ccw(c-250.884,9.805) -251.384,9.805 ccw(c-250.884,9.805) -250.884,9.305 ccw(c-250.884,9.805) -250.384,9.805
no net on FAB_DWG (solid): -248.384,9.805 ccw(c-248.884,9.805) -248.884,10.305 ccw(c-248.884,9.805) -249.384,9.805 ccw(c-248.884,9.805) -248.884,9.305 ccw(c-248.884,9.805) -248.384,9.805
no net on FAB_DWG (solid): -252.384,9.805 ccw(c-252.884,9.805) -252.884,10.305 ccw(c-252.884,9.805) -253.384,9.805 ccw(c-252.884,9.805) -252.884,9.305 ccw(c-252.884,9.805) -252.384,9.805
no net on FAB_DWG (solid): -254.384,9.805 ccw(c-254.884,9.805) -254.884,10.305 ccw(c-254.884,9.805) -255.384,9.805 ccw(c-254.884,9.805) -254.884,9.305 ccw(c-254.884,9.805) -254.384,9.805
no net on FAB_DWG (solid): -256.384,33.805 ccw(c-256.884,33.805) -256.884,34.305 ccw(c-256.884,33.805) -257.384,33.805 ccw(c-256.884,33.805) -256.884,33.305 ccw(c-256.884,33.805) -256.384,33.805
no net on FAB_DWG (solid): -258.384,33.805 ccw(c-258.884,33.805) -258.884,34.305 ccw(c-258.884,33.805) -259.384,33.805 ccw(c-258.884,33.805) -258.884,33.305 ccw(c-258.884,33.805) -258.384,33.805
no net on FAB_DWG (solid): -262.384,33.805 ccw(c-262.884,33.805) -262.884,34.305 ccw(c-262.884,33.805) -263.384,33.805 ccw(c-262.884,33.805) -262.884,33.305 ccw(c-262.884,33.805) -262.384,33.805
no net on FAB_DWG (solid): -260.384,33.805 ccw(c-260.884,33.805) -260.884,34.305 ccw(c-260.884,33.805) -261.384,33.805 ccw(c-260.884,33.805) -260.884,33.305 ccw(c-260.884,33.805) -260.384,33.805
no net on FAB_DWG (solid): -256.384,9.805 ccw(c-256.884,9.805) -256.884,10.305 ccw(c-256.884,9.805) -257.384,9.805 ccw(c-256.884,9.805) -256.884,9.305 ccw(c-256.884,9.805) -256.384,9.805
no net on FAB_DWG (solid): -258.384,9.805 ccw(c-258.884,9.805) -258.884,10.305 ccw(c-258.884,9.805) -259.384,9.805 ccw(c-258.884,9.805) -258.884,9.305 ccw(c-258.884,9.805) -258.384,9.805
no net on FAB_DWG (solid): -260.384,9.805 ccw(c-260.884,9.805) -260.884,10.305 ccw(c-260.884,9.805) -261.384,9.805 ccw(c-260.884,9.805) -260.884,9.305 ccw(c-260.884,9.805) -260.384,9.805
no net on FAB_DWG (solid): -262.384,9.805 ccw(c-262.884,9.805) -262.884,10.305 ccw(c-262.884,9.805) -263.384,9.805 ccw(c-262.884,9.805) -262.884,9.305 ccw(c-262.884,9.805) -262.384,9.805
no net on FAB_DWG (solid): -264.384,33.805 ccw(c-264.884,33.805) -264.884,34.305 ccw(c-264.884,33.805) -265.384,33.805 ccw(c-264.884,33.805) -264.884,33.305 ccw(c-264.884,33.805) -264.384,33.805
no net on FAB_DWG (solid): -266.384,33.805 ccw(c-266.884,33.805) -266.884,34.305 ccw(c-266.884,33.805) -267.384,33.805 ccw(c-266.884,33.805) -266.884,33.305 ccw(c-266.884,33.805) -266.384,33.805
no net on FAB_DWG (solid): -268.984,25.305 -268.484,26.805 -237.284,26.805 -236.784,25.305 -268.984,25.305
no net on FAB_DWG (solid): -236.784,18.305 -237.284,16.805 -268.484,16.805 -268.984,18.305 -236.784,18.305
no net on FAB_DWG (solid): -264.384,9.805 ccw(c-264.884,9.805) -264.884,10.305 ccw(c-264.884,9.805) -265.384,9.805 ccw(c-264.884,9.805) -264.884,9.305 ccw(c-264.884,9.805) -264.384,9.805
no net on FAB_DWG (solid): -266.384,9.805 ccw(c-266.884,9.805) -266.884,10.305 ccw(c-266.884,9.805) -267.384,9.805 ccw(c-266.884,9.805) -266.884,9.305 ccw(c-266.884,9.805) -266.384,9.805
no net on FAB_DWG (solid): -323.884,33.305 -324.884,37.305 -323.884,36.805 -322.884,37.305 -323.884,33.305
no net on FAB_DWG (solid): -323.884,9.305 -322.884,5.305 -323.884,5.805 -324.884,5.305 -323.884,9.305
no net on FAB_DWG (solid): 82 vertices, not listed, extent 356.458,-60.093 362.803,-56.865
no net on FAB_DWG (solid): 83 vertices, not listed, extent 344.845,-61.449 349.75,-56.861
no net on FAB_DWG (solid): 74 vertices, not listed, extent 331.063,-62.683 338.456,-55.948
no net on FAB_DWG (solid): 89 vertices, not listed, extent 319.393,-59.712 325.813,-55.948
no net on FAB_DWG (solid): 1029 vertices, not listed, extent 279.174,-69.52 420.22,-55.946
no net on ASY_DWG (solid): 82 vertices, not listed, extent 356.458,-60.093 362.803,-56.865
no net on ASY_DWG (solid): 83 vertices, not listed, extent 344.845,-61.449 349.75,-56.861
no net on ASY_DWG (solid): 74 vertices, not listed, extent 331.063,-62.683 338.456,-55.948
no net on ASY_DWG (solid): 89 vertices, not listed, extent 319.393,-59.712 325.813,-55.948
no net on ASY_DWG (solid): 1029 vertices, not listed, extent 279.174,-69.52 420.22,-55.946
no net on ASY_DWG_R (solid): 82 vertices, not listed, extent -293.363,-60.093 -287.018,-56.865
no net on ASY_DWG_R (solid): 83 vertices, not listed, extent -280.311,-61.449 -275.406,-56.861
no net on ASY_DWG_R (solid): 74 vertices, not listed, extent -269.016,-62.683 -261.624,-55.948
no net on ASY_DWG_R (solid): 89 vertices, not listed, extent -256.373,-59.712 -249.954,-55.948
no net on ASY_DWG_R (solid): 1029 vertices, not listed, extent -350.78,-69.52 -209.734,-55.946
no net on TITLEBLOCK (solid): 26 vertices, not listed, extent 3.27,-37.42 5.97,-36.12
no net on TITLEBLOCK (solid): -1.57,-38.02 -0.58,-36.22 0.32,-38.02 -1.57,-38.02
no net on TITLEBLOCK (solid): -12.055,-36.12 -10.932,-37.329 -9.853,-36.12 -12.055,-36.12
no net on TITLEBLOCK (solid): -6.868,-36.12 -4.33,-38.438 -4.33,-36.12 -6.868,-36.12
no net on TITLEBLOCK (solid): 331 vertices, not listed, extent -28.805,-42.52 29.9,-35.9
VCC_3V3_APP on Top Layer "VCC_3V3_APP_L01_P014" (solid, pour order 14): 59.006,14.443 58.22,14.443 57.264,13.703 55.928,13.703 55.394,13.169 55.394,12.168 55.799,11.763 59.006,11.763
VCC_HAPTICS on Top Layer "VCC_HAPTICS_L01_P008" (solid, pour order 8): 21 vertices, not listed, extent 67.575,-1.475 74.225,15.736
AN_TRIGGER on Top Layer "AN_TRIGGER_L01_P004" (solid, pour order 4): 92.06,16.3 92.1,16.26 92.1,13.22 94.25,13.22 94.98,12.49 96.3,12.49 96.3,14.109 94.209,16.2
NetC1_1 on Top Layer "NETC1_1_L01_P002" (solid, pour order 2): 90.2,20.2 90.2,17.133 93.7,17.133 93.7,18.6 93.3,18.6 92.7,19.2 92.797,19.297 92.797,20.2
NetC6_P on Top Layer "NETC6_P_L01_P006" (solid, pour order 6): 64.607,20.311 64.607,18.111 65.388,17.33 65.35,12.375 66.425,11.3 68.6,11.3 69.453,12.153 69.471,14.995 70.375,15.9 72.202,15.9 73.1,16.798 73.1,20.202 72.725,20.577 64.873,20.577
GND on Top Layer "GND_TOP" (solid, pour order 20): -3.15,36.85 -3.15,-3.15 96.85,-3.15 96.85,36.85 -3.15,36.85
NetD1_A on Top Layer "NETD1_A_L01_P000" (solid, pour order 0): 73.613,9.9 72.054,9.9 72.054,5.773 70.51,4.228 69.325,3.043 69.325,1.186 68.8,0.661 68.8,-1.5 70.229,-1.5 70.229,2.475 71.181,3.427 73.1,3.427 73.613,3.939
GND on Bottom Layer "GND_L02_P012" (solid, pour order 12): 96.85,36.85 96.85,-3.15 -3.15,-3.15 -3.15,36.85

## Other copper
Top Layer:
  text ".Layer_Name" at -0.203,-61.15 h3.5
Bottom Layer:
  text "'.Board_Number'-R'.PCB_Revision'" at 21.6,-0.625 h1.52
  text ".Layer_Name" at -4.694,-61.15 h3.5

## Silkscreen, mask and mechanical layers (free items; w line width, h text height)
Top Overlay:
  region: 70.9,33.7 74.9,33.7 74.9,29.7 70.9,29.7
  lines w0.1: 10.4,18.2 16.4,18.2 16.4,35.2 10.4,35.2 10.4,18.2
  text "'.Board_Name'" at 58.7,34.6 h1
  text "REV" at 66.4,32.1 h1.2
  text "'.Board_Number'" at 59,32 h1.2
  text "MENU" at 0.375,20.271 h1 r90
  text "SYSTEM" at 40.319,19 h1 r90
  text "TRACKPAD" at 20.3,18.978 h1 r90
  text "AUX" at 30.15,5.442 h1 r90
  text "TRIGGER" at 10,4.188 h1 r90
  text ".Layer_Name" at -1.044,-61.067 h3.5
Bottom Overlay:
  text ".Layer_Name" at -5.969,-60.992 h3.5
Top Paste:
  text ".Layer_Name" at -0.919,-61.767 h3.5
Bottom Paste:
  text ".Layer_Name" at -4.844,-61.733 h3.5
Top Solder:
  text ".Layer_Name" at -1.028,-61.15 h3.5
Bottom Solder:
  text ".Layer_Name" at -4.469,-61.267 h3.5
Drill Guide:
  text ".Layer_Name" at 21.431,-16.317 h3.81
Outline:
  the board outline again, w0.013
FAB_DWG:
  drawing of 157 lines, arcs and shapes, not listed
  text "1" at 363.056,388.468 h7.62
  text "6" at -188.276,388.29 h7.62
  text "5" at -77.684,388.214 h7.62
  text "7" at -298.207,388.163 h7.62
  text "4" at 31.917,388.062 h7.62
  text "3" at 142.686,388.062 h7.62
  text "2" at 252.719,388.062 h7.62
  text "REVISIONS" at 317.076,379.48 h2.54
  text "REV" at 234.784,372.48 h2.03
  text "DESCRIPTION" at 289.288,372.48 h2.03
  text "DATE" at 380.972,372.48 h2.03
  text "APRVD" at 406.16,372.48 h2.03
  text "NOTES: UNLESS OTHERWISE SPECIFIED" at -321.127,366.665 h2.03
  text "01" at 235.188,364.48 h2.54
  text "INITIAL RELEASE" at 246.22,364.48 h2.54
  text "08/08/2016" at 375.06,364.48 h2.54
  text "1   DIMENSIONS AND VALUES ARE METRIC." at -324.877,358.665 h2.03
  text "02" at 235.188,357.98 h2.54
  text "ALPHA 2 RELEASE" at 246.22,357.98 h2.54
  text "09/16/2016" at 375.06,357.98 h2.54
  text "2   FABRICATION OF PRINTED CIRCUIT BOARD SHALL BE IN ACCORDANCE WITH" at -324.877,352.665 h2.03
  text "IPC-6011 AND IPC-6012, CLASS 2, AND THE DESIGN INTENT OF IPC-2221 AND" at -324.877,348.665 h2.03
  text "IPC-2222,CLASS 2, AND SHALL MEET THE ACCEPTABILITY REQUIREMENTS OF" at -324.877,344.665 h2.03
  text "IPC-A-600. PRODUCE PCB USING GERBER OR ODB++ FILES PROVIDED." at -324.877,340.665 h2.03
  text "3   FABRICATION VENDOR MUST BE UL APPROVED AND BOARD SHALL BE MARKED WITH" at -324.877,334.665 h2.03
  text "A UL REGISTERED LOGO. MATERIAL MUST MEET UL 94V-0 FLAMMABILITY RATING." at -324.877,330.665 h2.03
  text "4   MATERIAL REQUIREMENTS: MANUFACTURER SHALL SELECT MATERIALS TO ACHIEVE A" at -324.877,324.665 h2.03
  text "BALANCED CONSTRUCTION WITH THE OPTION OF MODIFYING DIELECTRIC THICKNESS" at -324.877,320.665 h2.03
  text "D" at 424.905,318.796 h7.62
  text "D" at -359.777,318.644 h7.62
  text "TO MEET THE REQUIREMENTS SPECIFIED HEREIN." at -324.877,316.665 h2.03
  text "5   BASE MATERIALS: GLASS EPOXY FR4 OR EQUIVALENT PER IPC-4101 MEETING RoHS" at -324.877,310.665 h2.03
  text "REQUIREMENTS FOR PCB FABRICATION AND ASSEMBLY, NOT LESS THAN TG150," at -324.877,306.665 h2.03
  text "A  SEE LAYER DETAIL FOR LAYER STACK UP, ESTIMATED DIELECTRIC THICKNESS," at -324.877,302.665 h2.03
  text "AND COPPER WEIGHT." at -324.877,298.665 h2.03
  text "B  MANUFACTURER SHALL SUBMIT A PROPOSED STACK UP FOR SYNAPSE APPROVAL" at -324.877,294.665 h2.03
  text "IF MODIFICATION IS REQUIRED." at -324.877,290.665 h2.03
  text "C  NO MATERIAL SUBSTITUTIONS WILL BE ALLOWED WITHOUT SYNAPSE APPROVAL." at -324.877,286.665 h2.03
  text "6   PROCESSING ALLOWANCE:" at -324.877,280.665 h2.03
  text "A  LAYER REGISTRATION FROM PRIMARY SIDE TO SECONDARY SIDE SHALL NOT" at -324.877,276.665 h2.03
  text "EXCEED 0.13mm TOTAL." at -324.877,272.665 h2.03
  text "B  MAXIMUM BOW AND TWIST SHALL BE .75% PER IPC-TM-650." at -324.877,268.665 h2.03
  text "7   VIAS" at -324.877,262.665 h2.03
  text "A  VIAS WITH A FINISHED HOLE SIZE OF 0.25mm OR SMALLER DO NOT REQUIRE" at -324.877,258.665 h2.03
  text "A MINIMUM HOLE SIZE AND MAY BE PLATED SHUT OR FILLED WITH SOLDER" at -324.877,254.665 h2.03
  text "MASK. MINIMUM SOLDER PLATING MUST BE MAINTAINED." at -324.877,250.665 h2.03
  text "B  ALL 0.2MM VIA-IN-PADS TO BE FILLED WITH NON-CONDUCTIVE EXPOXY AND COPLANAR." at -324.877,246.665 h2.03
  text "8   CONDUCTORS:  COPPER FOIL SHALL BE IN ACCORDANCE WITH IPC-4562/0." at -324.877,240.665 h2.03
  text "A  FINISH. COPPER PLATE THICKNESS ON SURFACE COPPER AND PLATED" at -324.877,236.665 h2.03
  text "THROUGH HOLES TO BE 0.025mm MINIMUM." at -324.877,232.665 h2.03
  text "B  MINIMUM FINISH CONDUCTOR WIDTH IS 0.076mm" at -324.877,228.665 h2.03
  text "C  MINIMUM FINISHED CONDUCTOR SPACING (AIR GAP) INCLUDING PADS, VIAS," at -324.877,224.665 h2.03
  text "SHAPES, ETC. IS 0.076mm." at -324.877,220.665 h2.03
  text "9   FINAL FINISH SHALL BE ELECTROLESS NICKEL / IMMERSION GOLD (ENIG)." at -324.877,214.665 h2.03
  text "FINISH THICKNESS SHALL BE 3 TO 6 um [118 TO 236 MICROINCHES] OF NICKEL" at -324.877,210.665 h2.03
  text "AND 0.04 TO 0.125um [1.5 TO 5 MICROINCHES] OF GOLD." at -324.877,206.665 h2.03
  text "FINISH SHALL BE RoHS COMPLIANT AND MEET REQUIREMENTS OF IPC-4552." at -324.877,202.665 h2.03
  text "10  FILLETING IS NOT PERMITTED WITHOUT PRIOR SYNAPSE APPROVAL." at -324.877,196.665 h2.03
  text "C" at 424.905,193.345 h7.62
  text "C" at -359.904,193.142 h7.62
  text "11  SOLDER MASK AND COATING:  APPLY SOLDER MASK TO PRIMARY AND SECONDARY" at -324.877,190.665 h2.03
  text "SIDES OF PRINTED WIRING BOARD USING SUPPLIED GERBER FILES IN ACCORDANCE" at -324.877,186.665 h2.03
  text "WITH IPC-SM-840, THICKNESS BETWEEN 0.02 - 0.04mm, COLOR GREEN LIQUID," at -324.877,182.665 h2.03
  text "PHOTO-IMAGEABLE, CLASS 2." at -324.877,178.665 h2.03
  text "12  OVERALL BOARD THICKNESS SHALL BE MEASURED OVER FINAL FINISH INCLUDING" at -324.877,172.665 h2.03
  text "SOLDER MASK." at -324.877,168.665 h2.03
  text "13  SILKSCREEN:  APPLY SILKSCREEN (LEGEND) TO PRIMARY AND SECONDARY SIDES" at -324.877,162.665 h2.03
  text "OF PRINTED CIRCUIT BOARD. USE PERMANENT INK, NON-NUTRIENT, NON-" at -324.877,158.665 h2.03
  text "CONDUCTIVE POLYMER, COLOR WHITE, PER IPC-4781, TYPE 2. RELIEVE LEGEND" at -324.877,154.665 h2.03
  text "FROM ALL EXPOSED LANDS AND HOLES AS REQUIRED." at -324.877,150.665 h2.03
  text "14  ANY ALTERATIONS TO THE PROVIDED GERBER ARTWORK FILES MUST BE SUBMITTED" at -324.877,144.665 h2.03
  text "TO SYNAPSE FOR APPROVAL." at -324.877,140.665 h2.03
  text "15  MARK MANUFACTURER NAME, INITIALS, OR LOGO, LOT NUMBER, DATE CODE," at -324.708,135.277 h2.03
  text "UL RECOGNITION MARK AND FLAME RATING IN ETCH OR SILKSCREEN." at -324.708,131.277 h2.03
  text "16  PANELIZATION: COORDINATE WITH SYNAPSE OR THE SYNAPSE SPECIFIED" at -324.708,125.527 h2.03
  text "ASSEMBLY VENDOR FOR PANEL SIZE AND CONFIGURATION. IF BOARDS ARE" at -324.708,121.527 h2.03
  text "NOT TO BE COMPLETELY ROUTED OUT, TRIM PANELIZATION TABS TO LESS" at -324.708,117.527 h2.03
  text "THAN 0.1mm UPON DE-PANELIZATION. AVOID PANELIZATION TABS IN AREAS" at -324.708,113.527 h2.03
  text "INDICATED ON THIS DRAWING." at -324.708,109.527 h2.03
  text "17  BOARD MUST BE ELECTRICALLY TESTED USING SUPPLIED IPC-356 NETLIST." at -324.708,104.527 h2.03
  text "B" at -359.675,67.742 h7.62
  text "B" at 425.032,67.742 h7.62
  text "PRIMARY SIDE" at -263.876,42.805 h2.29
  text "SILKSCREEN" at -233.384,37.805 h2.29
  text "SOLDERMASK" at -233.384,32.305 h2.29
  text "1.57 +/-0.15" at -334.876,25.805 h2.29
  text "1 OZ CU" at -285.208,25.305 h2.29
  text "LAYER 1" at -233.384,24.805 h2.29
  text "FINISHED" at -331.212,20.805 h2.29
  text "DIELECTRIC" at -290.704,20.805 h2.29
  text "1 OZ CU" at -285.208,16.305 h2.29
  text "LAYER 2" at -233.384,16.305 h2.29
  text "THICKNESS" at -332.628,15.805 h2.29
  text "SOLDERMASK" at -233.384,8.805 h2.29
  text "SILKSCREEN" at -233.384,2.805 h2.29
  text "SECONDARY SIDE" at -265.708,-1.695 h2.29
  text "LAYER DETAIL" at -277.268,-14.69 h5.08
  text "SCALE:NONE" at -263.544,-21.695 h2.29
  text "DIMENSIONS ARE FOR REFERENCE ONLY," at 1.15,-25.15 h2.29
  text "CAP CONSTRUCTION SHOWN (PREFERRED)" at -282.145,-29.806 h2.03
  text "USE BOARD OUTLINE FOR DIMENSIONAL DATA." at -3.44,-29.94 h2.29
  text "CORE CONSTRUCTION ACCEPTABLE" at -277.273,-34.611 h2.03
  text "A" at 424.778,-58.013 h7.62
  text "A" at -359.929,-58.14 h7.62
  text "APPROVALS" at 216.912,-61.52 h2.03
  text "DATE" at 259.972,-61.52 h2.03
  text "UNLESS OTHERWISE" at 160.964,-63.52 h2.54
  text "DESIGNER" at 200.22,-67.52 h2.03
  text "SPECIFIED" at 168.076,-68.52 h2.54
  text "DIMENSIONS ARE" at 162.996,-73.52 h2.54
  text "PRICE" at 204.22,-73.52 h2.54
  text "09/16/2016" at 254.06,-73.52 h2.54
  text "1511 Sixth Ave. Suite 300, Seattle, WA 98101 206.381.0898" at 291.308,-74.52 h2.54
  text "IN MILLIMETERS" at 162.996,-78.52 h2.54
  text "ENGINEER" at 200.22,-80.52 h2.03
  text "PRINTED CIRCUIT BOARD" at 317.716,-83.02 h3.81
  text "PROPRIETARY" at 112.456,-83.52 h3.81
  text "BRUEY /  CIUFFO" at 202.272,-86.576 h2.54
  text "TOLERANCES:" at 167.044,-88.52 h2.54
  text "AND" at 124.648,-89.52 h3.81
  text ".Board_Name" at 308.775,-91.6 h5.08
  text "MECH ENG" at 200.22,-93.52 h2.03
  text ".XX" at 165.724,-95.52 h2.29
  text "0.25" at 179.22,-95.52 h2.29
  text "CONFIDENTIAL" at 110.932,-96.02 h3.81
  text "SIZE" at 283.372,-97.52 h1.78
  text "DWG NO" at 294.22,-97.52 h1.78
  text "REV" at 402.084,-97.52 h1.78
  text "DAHLGREN / DONAGHY" at 204.344,-99.585 h2.54
  text "THE INFORMATION CONTAINED IN" at 112.946,-100.27 h1.52
  text ".XXX" at 163.892,-102.52 h2.29
  text "0.127" at 179.22,-102.52 h2.29
  text "THIS DRAWING IS PROPRIETARY AND" at 111.122,-103.02 h1.52
  text "RESTRICTED. ANY REPRODUCTION" at 112.946,-105.77 h1.52
  text "601-" at 311.275,-107.221 h7.62
  text ".Board_Number" at 339.675,-107.321 h7.62
  text "D" at 283.172,-107.52 h7.62
  text ".PCB_Revision" at 397.616,-108.028 h7.62
  text "IN PART OR WHOLE WITHOUT THE" at 112.946,-108.52 h1.52
  text "ANGLES" at 166.228,-109.52 h2.29
  text "5" at 185.22,-109.52 h2.29
  text "EXPRESS WRITTEN PERMISSION" at 113.912,-111.27 h1.52
  text "OF THE OWNER IS PROHIBITED" at 113.912,-114.02 h1.52
  text "SCALE:NONE" at 284.1,-114.52 h1.78
  text "SHEET 1 OF 1" at 395.676,-114.52 h1.78
  text "1" at 363.26,-126.568 h7.62
  text "6" at -188.2,-126.72 h7.62
  text "5" at -77.761,-126.72 h7.62
  text "4" at 31.688,-126.999 h7.62
  text "3" at 142.508,-127.025 h7.62
  text "2" at 252.947,-127.025 h7.62
  text "7" at -298.309,-127.584 h7.62